# Altium PCB isa_svga.PcbDoc (part 1 of 2)
Units mm, origin at the board's own origin, x right, y up, seen from the top; angles counter-clockwise.
Board outline 104.14 x 87.63 mm, 2 copper layers (Front, Back); 62 components, 153 nets, 436 pads, 95 vias.
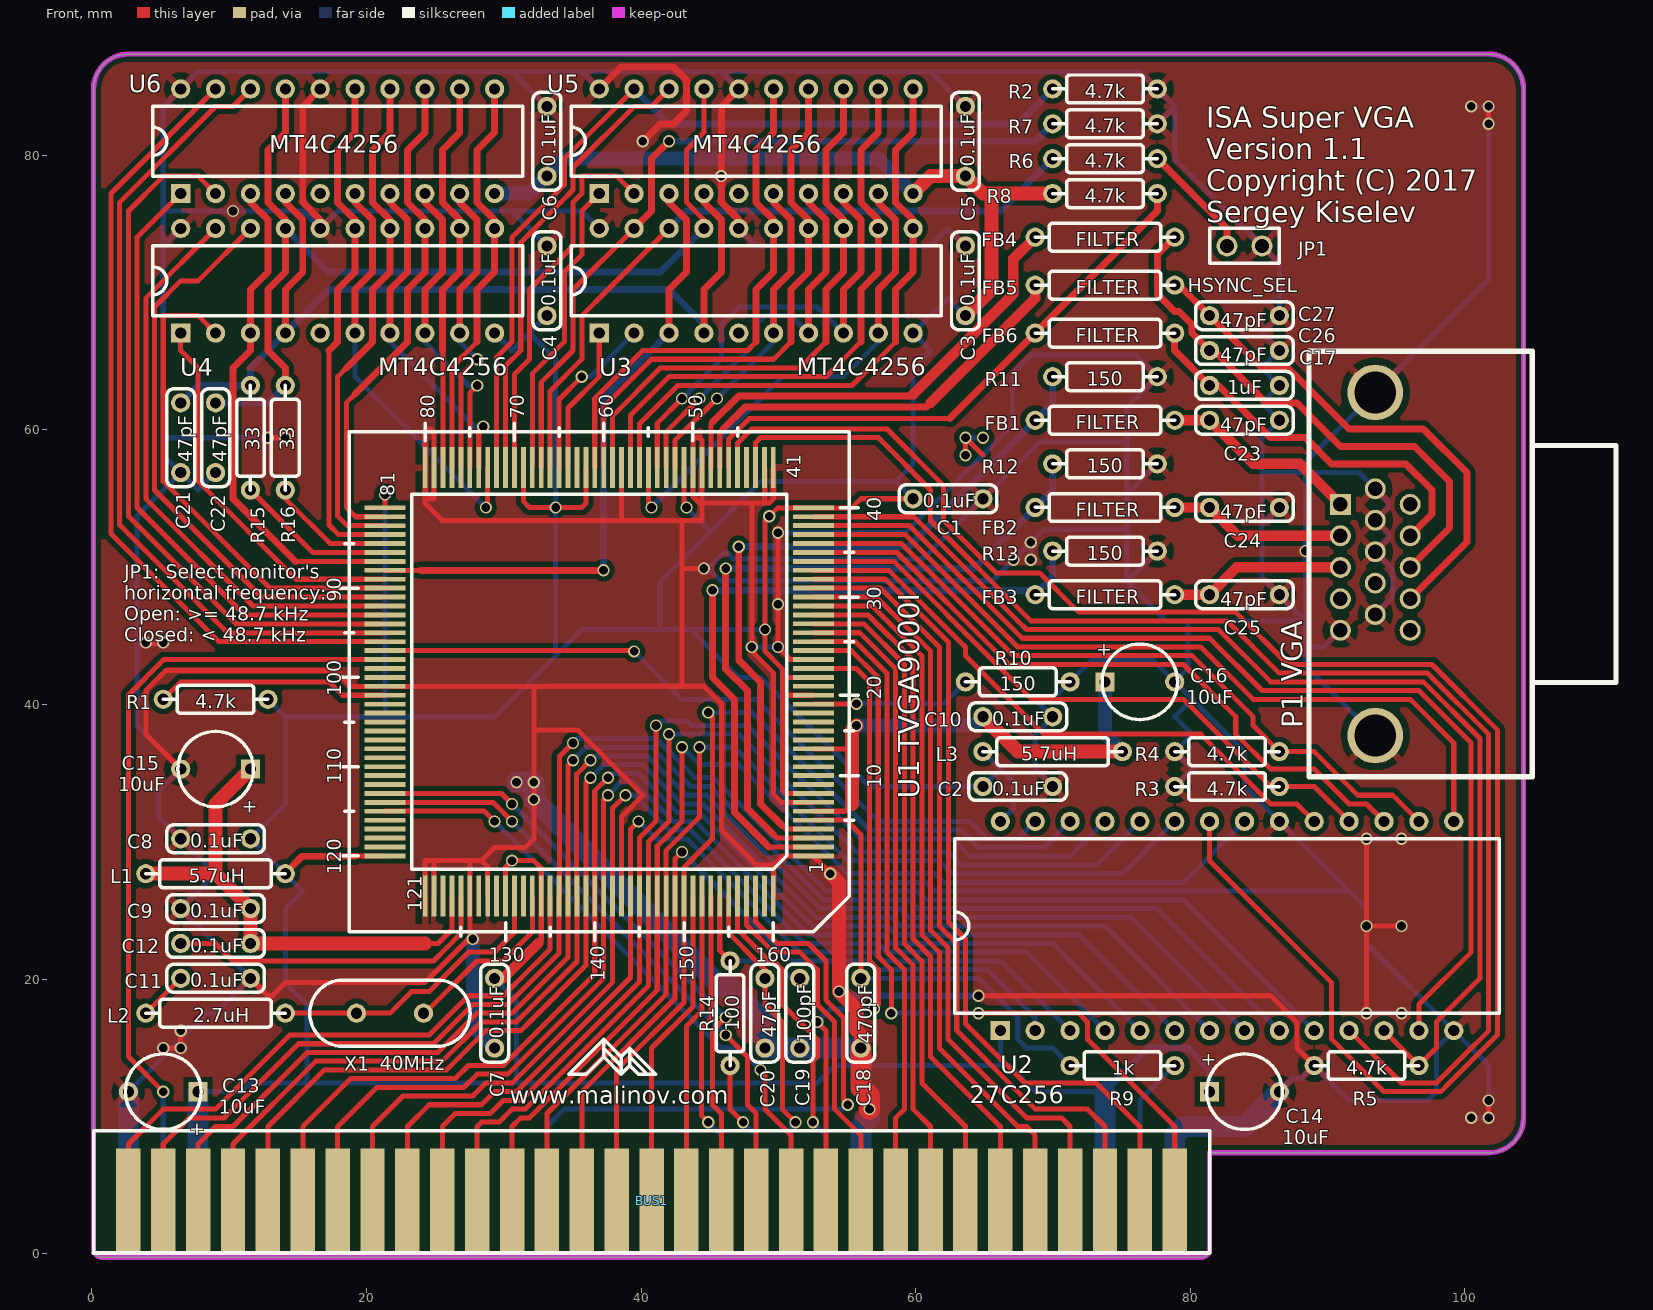
[diagram p0: Front view]
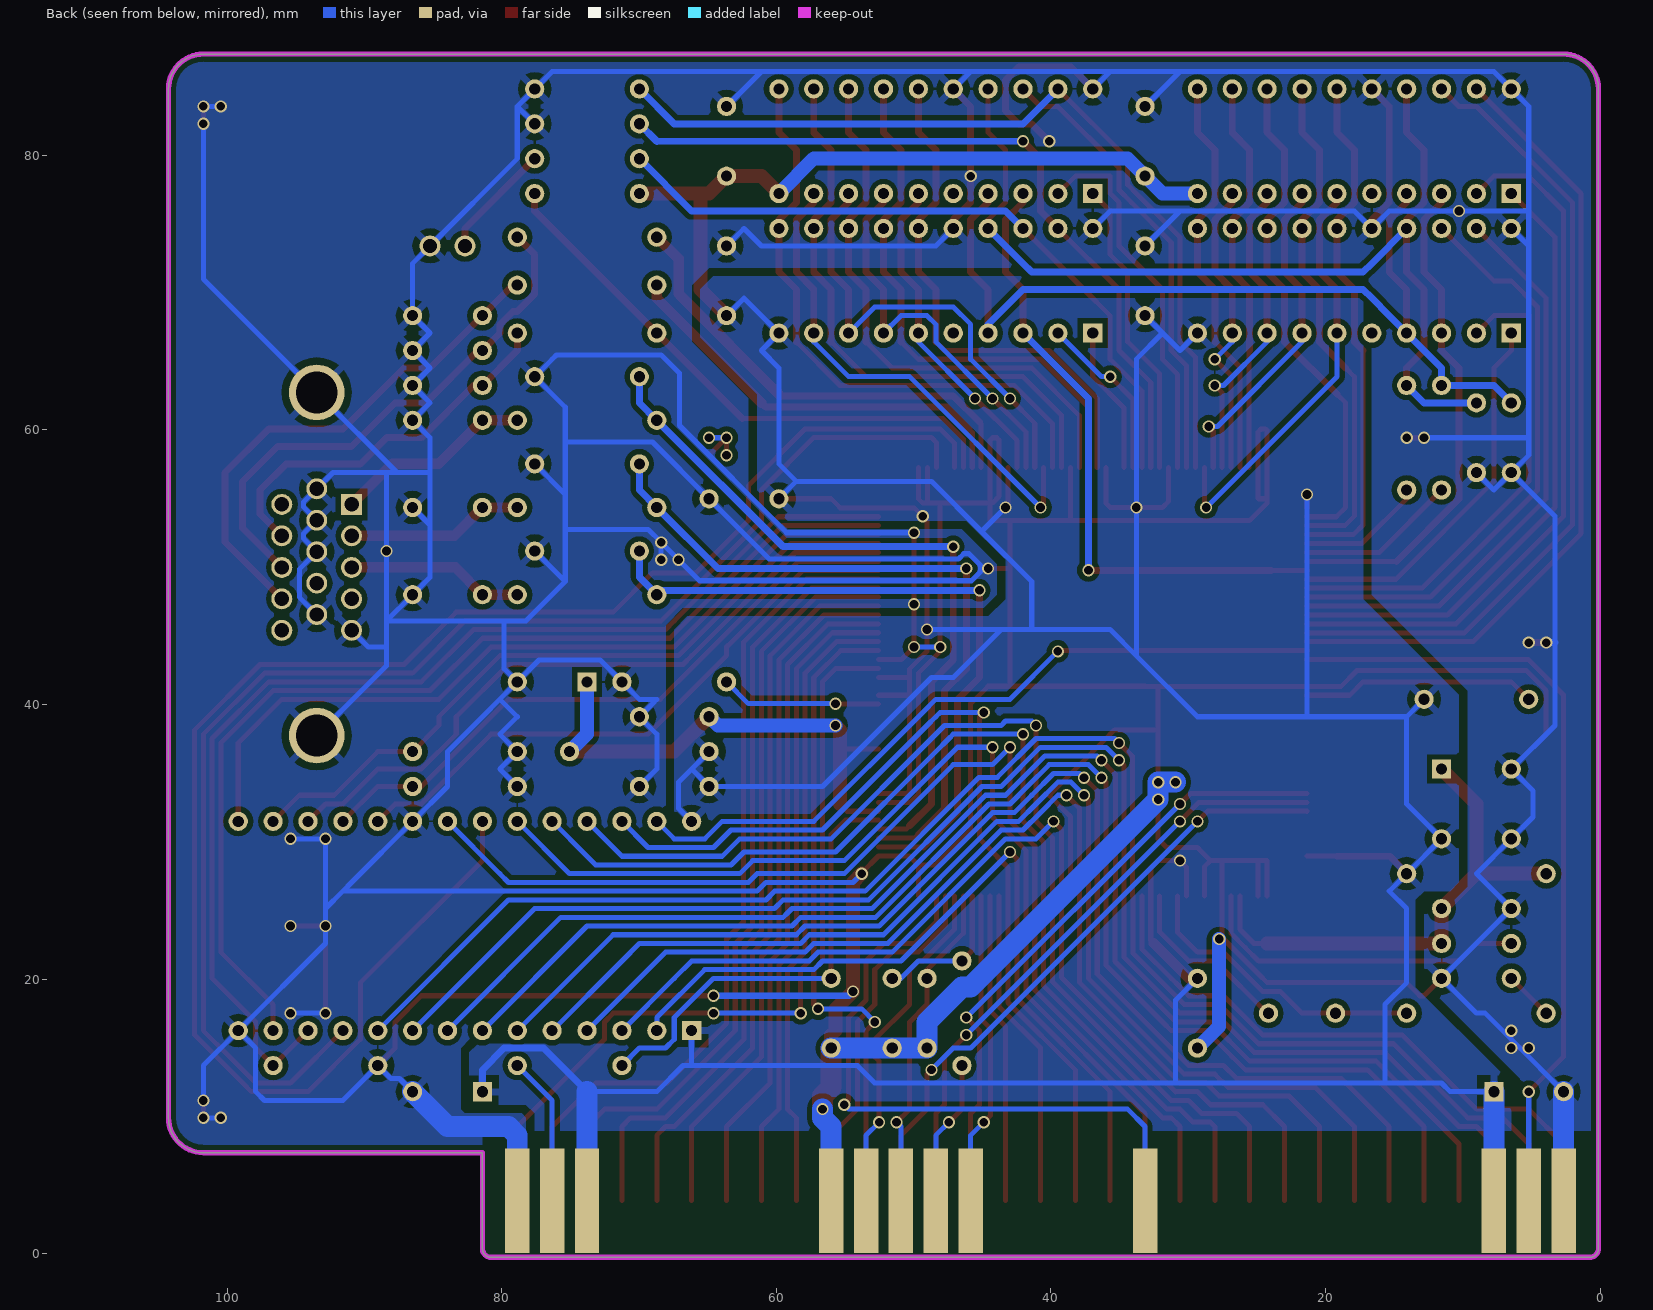
[diagram p1: Back view, seen from below]

## Layer stack, top to bottom
F.Mask: solder mask 0.0102, Solder Resist, Dk 3.5
Front: signal copper 0.0356
Dielectric 1: dielectric 0.32, FR-4, Dk 4.8
Back: signal copper 0.0356
B.Mask: solder mask 0.0102, Solder Resist, Dk 3.5

## Board outline
0.127,0.381 0.127,84.836 cw(c2.667,84.836) 101.727,87.376 cw(c101.727,84.836) 104.267,84.836 104.267,9.906 cw(c101.727,9.906) 101.727,7.366 81.407,7.366 81.407,0.381 cw(c80.772,0.381) 80.772,-0.254 0.762,-0.254 cw(c0.762,0.381) 0.127,0.381

## Design rules (kind name [scope] priority, off if disabled: settings)
Clearance "Clearence 0.37846_Polygon" [InNamedPolygon('Front-GND') OR InNamedPolygon('Back-VCC') OR InNamedPolygon('Back-GND')] p1: gap=0.378 ignorepadtopadclearanceinfootprint=FALSE
Clearance "Clearence 0.254_NetClass" [InNetClass('Default') OR InNetClass('Power')] p2: gap=0.254 ignorepadtopadclearanceinfootprint=FALSE
HoleSize "Hole Size (Default)" [All] p1: absolutevalues=TRUE maxlimit=10 minlimit=0.508 maxpercent=80.000 minpercent=20.000
MinimumSolderMaskSliver [All] p1: minsoldermaskwidth=0
PolygonConnect Polygon_Back-GND_ConnectDirect [IsNamedPolygon('Back-GND') vs IsVia] p1: connectstyle=Direct reliefconductorwidth=0.254 reliefentries=4 polygonreliefangle="90 Angle" airgapwidth=0.254
PolygonConnect Polygon_Back-GND_ConnectRelief45 [IsNamedPolygon('Back-GND') vs (IsThruPin or IsSMTPin) and (PadShape_AllLayers = 'Round')] p2: connectstyle=Relief reliefconductorwidth=0.508 reliefentries=4 polygonreliefangle="45 Angle" airgapwidth=0.508
PolygonConnect Polygon_Back-GND_ConnectRelief90 [IsNamedPolygon('Back-GND') vs (IsThruPin or IsSMTPin) and (PadShape_AllLayers <> 'Round')] p3: connectstyle=Relief reliefconductorwidth=0.508 reliefentries=4 polygonreliefangle="90 Angle" airgapwidth=0.508
PolygonConnect Polygon_Back-VCC_ConnectDirect [IsNamedPolygon('Back-VCC') vs IsVia] p4: connectstyle=Direct reliefconductorwidth=0.254 reliefentries=4 polygonreliefangle="90 Angle" airgapwidth=0.254
PolygonConnect Polygon_Back-VCC_ConnectRelief45 [IsNamedPolygon('Back-VCC') vs (IsThruPin or IsSMTPin) and (PadShape_AllLayers = 'Round')] p5: connectstyle=Relief reliefconductorwidth=0.508 reliefentries=4 polygonreliefangle="45 Angle" airgapwidth=0.508
PolygonConnect Polygon_Back-VCC_ConnectRelief90 [IsNamedPolygon('Back-VCC') vs (IsThruPin or IsSMTPin) and (PadShape_AllLayers <> 'Round')] p6: connectstyle=Relief reliefconductorwidth=0.508 reliefentries=4 polygonreliefangle="90 Angle" airgapwidth=0.508
PolygonConnect Polygon_Front-GND_ConnectDirect [IsNamedPolygon('Front-GND') vs IsVia] p7: connectstyle=Direct reliefconductorwidth=0.254 reliefentries=4 polygonreliefangle="90 Angle" airgapwidth=0.254
PolygonConnect Polygon_Front-GND_ConnectRelief45 [IsNamedPolygon('Front-GND') vs (IsThruPin or IsSMTPin) and (PadShape_AllLayers = 'Round')] p8: connectstyle=Relief reliefconductorwidth=0.508 reliefentries=4 polygonreliefangle="45 Angle" airgapwidth=0.508
PolygonConnect Polygon_Front-GND_ConnectRelief90 [IsNamedPolygon('Front-GND') vs (IsThruPin or IsSMTPin) and (PadShape_AllLayers <> 'Round')] p9: connectstyle=Relief reliefconductorwidth=0.508 reliefentries=4 polygonreliefangle="90 Angle" airgapwidth=0.508
RoutingVias [All] p1: holewidth=0.711 width=1.27 viastyle="Through Hole" minholewidth=0.711 minwidth=1.27 maxholewidth=0.711 maxwidth=1.27
SilkToSilkClearance [All] p1: silktosilkclearance=0
SilkToSolderMaskClearance [IsPad] p1: minsilkscreentomaskgap=0 clearancetoexposedcopper=TRUE
SolderMaskExpansion [All] p1: expansion=0.102 istentingtop=FALSE
Width [All] p1: maxlimit=10 minlimit=0.203 preferedwidth=0.368 minimp=50.000000 maximp=50.000000 favimp=50.000000
26 further rules are at their usual default settings.

## Classes and differential pairs
net class Default: A0 A1 A2 A3 A4 A5 A6 A7 A8 A9 A10 A11 A12 A13 A14 A15 A16 A17 A18 A19 AEN AVDD1 AVDD2 B BLUE C\A\S\ D0 D1 D2 D3 D4 D5 D6 D7 G GND GREEN HSYNC I\O\R\ I\O\W\ IOCHRDY M\E\M\R\ M\E\M\W\ MAA0 MAA1 MAA2 MAA3 MAA4 MAA5 MAA6 MAA7 MAA8 MAB0 MAB1 MAB2 MAB3 MAB4 MAB5 MAB6 MAB7 MAB8 MD0 MD1 MD2 MD3 MD4 MD5 MD6 MD7 MD16 MD17 MD18 MD19 MD20 MD21 MD22 MD23 MONITOR N\M\I\ Net-(C11-Pad1) Net-(C12-Pad2) Net-(C17-Pad1) Net-(C18-Pad1) Net-(C19-Pad1) Net-(C26-Pad1) Net-(C27-Pad1) Net-(JP1-Pad1) Net-(L2-Pad2) Net-(P1-Pad4) Net-(P1-Pad9) Net-(P1-Pad11) Net-(P1-Pad15) Net-(R1-Pad1) Net-(R10-Pad1) Net-(R15-Pad1) Net-(R16-Pad1) Net-(U1-Pad9) Net-(U1-Pad10) Net-(U1-Pad11) Net-(U1-Pad12) Net-(U1-Pad14) Net-(U1-Pad15) Net-(U1-Pad16) Net-(U1-Pad17) Net-(U1-Pad20) Net-(U1-Pad44) Net-(U1-Pad63) Net-(U1-Pad99) Net-(U1-Pad100) Net-(U1-Pad103) Net-(U1-Pad104) Net-(U1-Pad105) Net-(U1-Pad106) Net-(U1-Pad107) Net-(U1-Pad108) Net-(U1-Pad109) Net-(U1-Pad110) Net-(U1-Pad111) Net-(U1-Pad112) Net-(U1-Pad116) Net-(U1-Pad117) Net-(U1-Pad118) Net-(U1-Pad119) Net-(U1-Pad123) Net-(U1-Pad127) Net-(U1-Pad129) Net-(U1-Pad132) Net-(U1-Pad133) Net-(U1-Pad159) Net-(U3-Pad5) Net-(U4-Pad5) Net-(U5-Pad5) Net-(U6-Pad5) OSC R R\A\S\ R\E\F\R\E\S\H\ R\O\M\C\S\ RED RESET RMD0 RMD1 RMD2 RMD3 RMD4 RMD5 RMD6 RMD7 ROMA0 VCC VSYNC W\E\0\ W\E\2\

## Components (designator, comment, footprint, x,y, rotation, side; value= is the part's Value field where it differs from the comment)
BUS1 "BUSPC_DEV" Conn_Bus_ISA8 40.767,3.873 r0 top
C1 "0.1uF" Cap_Cer_504 62.357,54.991 r0 top
C2 "0.1uF" Cap_Cer_504 67.437,34.036 r0 top
C3 "0.1uF" Cap_Cer_504 63.627,70.866 r90 top
C4 "0.1uF" Cap_Cer_504 33.147,70.866 r90 top
C5 "0.1uF" Cap_Cer_504 63.627,81.026 r90 top
C6 "0.1uF" Cap_Cer_504 33.147,81.026 r90 top
C7 "0.1uF" Cap_Cer_504 29.337,17.526 r270 top
C8 "0.1uF" Cap_Cer_504 9.017,30.226 r180 top
C9 "0.1uF" Cap_Cer_504 9.017,25.146 r180 top
C10 "0.1uF" Cap_Cer_504 67.437,39.116 r0 top
C11 "0.1uF" Cap_Cer_504 9.017,20.066 r0 top
C12 "0.1uF" Cap_Cer_504 9.017,22.606 r180 top
C13 "10uF" Cap_Tant_504 5.207,11.811 r180 top
C14 "10uF" Cap_Tant_504 83.947,11.811 r0 top
C15 "10uF" Cap_Tant_504 9.017,35.306 r180 top
C16 "10uF" Cap_Tant_504 76.327,41.656 r0 top
C17 "1uF" Cap_Cer_504 83.947,63.246 r0 top
C18 "470pF" Cap_Cer_504 56.007,17.526 r270 top
C19 "100pF" Cap_Cer_504 51.562,17.526 r270 top
C20 "47pF" Cap_Cer_504 49.022,17.526 r270 top
C21 "47pF" Cap_Cer_504 6.477,59.436 r270 top
C22 "47pF" Cap_Cer_504 9.017,59.436 r270 top
C23 "47pF" Cap_Cer_504 83.947,60.706 r0 top
C24 "47pF" Cap_Cer_504 83.947,54.356 r0 top
C25 "47pF" Cap_Cer_504 83.947,48.006 r0 top
C26 "47pF" Cap_Cer_504 83.947,65.786 r0 top
C27 "47pF" Cap_Cer_504 83.947,68.326 r0 top
FB1 "FILTER" Res_1016 73.787,60.706 r0 top
FB2 "FILTER" Res_1016 73.787,54.356 r0 top
FB3 "FILTER" Res_1016 73.787,48.006 r0 top
FB4 "FILTER" Res_1016 73.787,74.041 r180 top
FB5 "FILTER" Res_1016 73.787,70.549 r180 top
FB6 "FILTER" Res_1016 73.787,67.056 r180 top
JP1 "HSYNC_SEL" Conn_Pin_Header_2x1_Nokey 83.947,73.406 r0 top
L1 "5.7uH" Res_1016 9.017,27.686 r180 top
L2 "2.7uH" Res_1016 9.017,17.526 r0 top
L3 "5.7uH" Res_1016 69.977,36.576 r0 top
P1 "VGA" Conn_Dsub_DE15F 93.472,50.241 r270 top
R1 "4.7k" Res_762 9.017,40.386 r0 top
R2 "4.7k" Res_762 73.787,84.836 r0 top
R3 "4.7k" Res_762 82.677,34.036 r180 top
R4 "4.7k" Res_762 82.677,36.576 r180 top
R5 "4.7k" Res_762 92.837,13.716 r180 top
R6 "4.7k" Res_762 73.787,79.756 r0 top
R7 "4.7k" Res_762 73.787,82.296 r0 top
R8 "4.7k" Res_762 73.787,77.216 r180 top
R9 "1k" Res_762 75.057,13.716 r180 top
R10 "150" Res_762 67.437,41.656 r0 top
R11 "150" Res_762 73.787,63.881 r0 top
R12 "150" Res_762 73.787,57.531 r0 top
R13 "150" Res_762 73.787,51.181 r0 top
R14 "100" Res_762 46.482,17.526 r90 top
R15 "33" Res_762 11.557,59.436 r90 top
R16 "33" Res_762 14.097,59.436 r90 top
U1 "TVGA9000I" PQFP-160 36.957,41.656 r90 top
U2 "27C256" DIP28_600 82.677,23.876 r0 top
U3 "MT4C4256" DIP20_300 48.387,70.866 r0 top
U4 "MT4C4256" DIP20_300 17.907,70.866 r0 top
U5 "MT4C4256" DIP20_300 48.387,81.026 r0 top
U6 "MT4C4256" DIP20_300 17.907,81.026 r0 top
X1 "40MHz" Crystal_HC-49U_Vert 21.717,17.526 r180 top

## Footprints (in the part's own frame and the unit in brackets; to place one, negate y for a bottom-side part, rotate by r counter-clockwise, add the part's x,y. Pads: shape width x height; smd on the part's side, far side on the other; paste and mask are expansions set on the pad)
Cap_Cer_504 [mil]
  round 55 hole 32 paste-55 mask+10: 1(-100,0) 2(100,0)
  silkscreen extent -140,-40 140,40
Cap_Tant_504 [mil]
  rect 55x55 hole 32 paste-55 mask+10: 1(-100,0)
  round 55 hole 32 paste-55 mask+10: 2(100,0)
  silkscreen extent -108,-108 108,108
Conn_Bus_ISA8 [mil]
  rect 70x300 smd far side paste-300 mask+10: 1(1500,0) 2(1400,0) 3(1300,0) 10(600,0) 11(500,0) 12(400,0) 13(300,0) 14(200,0) 19(-300,0) 29(-1300,0) 30(-1400,0) 31(-1500,0)
  rect 70x300 smd paste-300 mask+10: 32(1500,0) 33(1400,0) 34(1300,0) 35(1200,0) 36(1100,0) 37(1000,0) 38(900,0) 39(800,0) 40(700,0) 41(600,0) 42(500,0) 43(400,0) 44(300,0) 45(200,0) 46(100,0) 47(0,0) 48(-100,0) 49(-200,0) 50(-300,0) 51(-400,0) 52(-500,0) 53(-600,0) 54(-700,0) 55(-800,0) 56(-900,0) 57(-1000,0) 58(-1100,0) 59(-1200,0) 60(-1300,0) 61(-1400,0) 62(-1500,0)
  silkscreen extent -1600,-150 1600,200
Conn_Dsub_DE15F [mil]
  rect 60x60 hole 41 paste-60 mask+10: 1(-170.9,-100)
  round 60 hole 41 paste-60 mask+10: 2(-80.7,-100) 3(9.8,-100) 4(100,-100) 5(190.2,-100) 6(-215.6,0) 7(-125.4,0) 8(-35.2,0) 9(54.9,0) 10(145.1,0) 11(-170.9,100) 12(-80.7,100) 13(9.8,100) 14(100,100) 15(190.2,100)
  round 159.4 hole 120.1 paste-159.4 mask+10: Un1(491.9,0) Un2(-491.9,0)
  silkscreen extent -610,-190 610,690
Conn_Pin_Header_2x1_Nokey [mil]
  rrect100% 60x60 hole 40 paste-60 mask+10: 1(-50,0)
  round 60 hole 40 paste-60 mask+10: 2(50,0)
  silkscreen extent -100,-50 100,50
Crystal_HC-49U_Vert [mil]
  round 55 hole 32 paste-55 mask+10: 1(-96.1,0) 2(96.1,0)
  silkscreen extent -230,-95 230,95
DIP20_300 [mil]
  rect 55x55 hole 32 paste-55 mask+10: 1(-450,-150)
  round 55 hole 32 paste-55 mask+10: 2(-350,-150) 3(-250,-150) 4(-150,-150) 5(-50,-150) 6(50,-150) 7(150,-150) 8(250,-150) 9(350,-150) 10(450,-150) 11(450,150) 12(350,150) 13(250,150) 14(150,150) 15(50,150) 16(-50,150) 17(-150,150) 18(-250,150) 19(-350,150) 20(-450,150)
  silkscreen extent -530,-100 530,100
DIP28_600 [mil]
  rect 55x55 hole 32 paste-55 mask+10: 1(-650,-300)
  round 55 hole 32 paste-55 mask+10: 2(-550,-300) 3(-450,-300) 4(-350,-300) 5(-250,-300) 6(-150,-300) 7(-50,-300) 8(50,-300) 9(150,-300) 10(250,-300) 11(350,-300) 12(450,-300) 13(550,-300) 14(650,-300) 15(650,300) 16(550,300) 17(450,300) 18(350,300) 19(250,300) 20(150,300) 21(50,300) 22(-50,300) 23(-150,300) 24(-250,300) 25(-350,300) 26(-450,300) 27(-550,300) 28(-650,300)
  silkscreen extent -780,-250 780,250
PQFP-160 [mil]
  rect 13.8x118.1 smd mask+10: 1(-499,-614.2) 2(-473.4,-614.2) 3(-447.8,-614.2) 4(-422.2,-614.2) 5(-396.6,-614.2) 6(-371,-614.2) 7(-345.4,-614.2) 8(-319.9,-614.2) 9(-294.3,-614.2) 10(-268.7,-614.2) 11(-243.1,-614.2) 12(-217.5,-614.2) 13(-191.9,-614.2) 14(-166.3,-614.2) 15(-140.7,-614.2) 16(-115.1,-614.2) 17(-89.5,-614.2) 18(-63.9,-614.2) 19(-38.4,-614.2) 20(-12.8,-614.2) 21(12.8,-614.2) 22(38.4,-614.2) 23(64,-614.2) 24(89.6,-614.2) 25(115.2,-614.2) 26(140.8,-614.2) 27(166.4,-614.2) 28(192,-614.2) 29(217.5,-614.2) 30(243.1,-614.2) 31(268.7,-614.2) 32(294.3,-614.2) 33(319.9,-614.2) 34(345.5,-614.2) 35(371.1,-614.2) 36(396.7,-614.2) 37(422.3,-614.2) 38(447.9,-614.2) 39(473.5,-614.2) 40(499,-614.2) 81(499,614.2) 82(473.4,614.2) 83(447.8,614.2) 84(422.2,614.2) 85(396.6,614.2) 86(371.1,614.2) 87(345.5,614.2) 88(319.9,614.2) 89(294.3,614.2) 90(268.7,614.2) 91(243.1,614.2) 92(217.5,614.2) 93(191.9,614.2) 94(166.3,614.2) 95(140.7,614.2) 96(115.2,614.2) 97(89.6,614.2) 98(64,614.2) 99(38.4,614.2) 100(12.8,614.2) 101(-12.8,614.2) 102(-38.4,614.2) 103(-64,614.2) 104(-89.6,614.2) 105(-115.2,614.2) 106(-140.8,614.2) 107(-166.3,614.2) 108(-191.9,614.2) 109(-217.5,614.2) 110(-243.1,614.2) 111(-268.7,614.2) 112(-294.3,614.2) 113(-319.9,614.2) 114(-345.5,614.2) 115(-371.1,614.2) 116(-396.7,614.2) 117(-422.2,614.2) 118(-447.8,614.2) 119(-473.4,614.2) 120(-499,614.2)
  rect 118.1x13.8 smd mask+10: 41(614.2,-499) 42(614.2,-473.4) 43(614.2,-447.8) 44(614.2,-422.2) 45(614.2,-396.7) 46(614.2,-371.1) 47(614.2,-345.5) 48(614.2,-319.9) 49(614.2,-294.3) 50(614.2,-268.7) 51(614.2,-243.1) 52(614.2,-217.5) 53(614.2,-191.9) 54(614.2,-166.3) 55(614.2,-140.8) 56(614.2,-115.2) 57(614.2,-89.6) 58(614.2,-64) 59(614.2,-38.4) 60(614.2,-12.8) 61(614.2,12.8) 62(614.2,38.4) 63(614.2,64) 64(614.2,89.6) 65(614.2,115.2) 66(614.2,140.8) 67(614.2,166.3) 68(614.2,191.9) 69(614.2,217.5) 70(614.2,243.1) 71(614.2,268.7) 72(614.2,294.3) 73(614.2,319.9) 74(614.2,345.5) 75(614.2,371.1) 76(614.2,396.7) 77(614.2,422.2) 78(614.2,447.8) 79(614.2,473.4) 80(614.2,499) 121(-614.2,499) 122(-614.2,473.4) 123(-614.2,447.8) 124(-614.2,422.2) 125(-614.2,396.7) 126(-614.2,371.1) 127(-614.2,345.5) 128(-614.2,319.9) 129(-614.2,294.3) 130(-614.2,268.7) 131(-614.2,243.1) 132(-614.2,217.5) 133(-614.2,191.9) 134(-614.2,166.3) 135(-614.2,140.8) 136(-614.2,115.2) 137(-614.2,89.6) 138(-614.2,64) 139(-614.2,38.4) 140(-614.2,12.8) 141(-614.2,-12.8) 142(-614.2,-38.4) 143(-614.2,-64) 144(-614.2,-89.6) 145(-614.2,-115.2) 146(-614.2,-140.7) 147(-614.2,-166.3) 148(-614.2,-191.9) 149(-614.2,-217.5) 150(-614.2,-243.1) 151(-614.2,-268.7) 152(-614.2,-294.3) 153(-614.2,-319.9) 154(-614.2,-345.5) 155(-614.2,-371.1) 156(-614.2,-396.6) 157(-614.2,-422.2) 158(-614.2,-447.8) 159(-614.2,-473.4) 160(-614.2,-499)
  silkscreen extent -742,-742 742,742
Res_762 [mil]
  round 55 hole 32 paste-55 mask+10: 1(-150,0) 2(150,0)
  silkscreen extent -150,-40 150,40
Res_1016 [mil]
  round 55 hole 32 paste-55 mask+10: 1(-200,0) 2(200,0)
  silkscreen extent -200,-40 200,40

## Part data
BUS1: library part Conn_Bus_ISA8, "ISA8 PCB edge connector"
C1 C2 C3 C4 C5 C6 C7 C8 C9 C10 C11 C12 C17 C18 C19 C20 C21 C22 C23 C24 C25 C26 C27: library part Cap_Cer_504, "Ceramic Capacitor 5.04mm"
C13 C14 C15 C16: library part Cap_Tant_504, "Tantalum Capacitor - 5.04mm"
FB1 FB2 FB3 FB4 FB5 FB6 L1 L2 L3: library part Res_1016, "Resistor 10.16mm between leads"
JP1: library part Conn_Pin_Header_2x1_Nokey, "Connector Pin Header 2x1 No Key"
P1: library part Conn_Dsub_DE15F, "Connector DE15 Female Right Angle Through Hole"
R1 R2 R3 R4 R5 R6 R7 R8 R9 R10 R11 R12 R13 R14 R15 R16: library part Res_762, "Resitance 3 pas"
U1: library part PQFP-160
U2: library part DIP28_600, "Module Dil 28 pins, pads ronds, e=600 mils"
U3 U4 U5 U6: library part DIP20_300, "20 pins DIL package, round pads"
X1: library part Crystal_HC-49U_Vert, "Quartz Crystal HC-49U Vertical"

## Via types
v1: diameter 0.889, hole 0.635, Front to Back, tented both sides, 95 vias

## Nets (pads, with @x,y where several pads share a name; then routed paths per layer and width w, separated by ;. In a path a pad name is that pad's centre, name@x,y a point inside that pad or via, vN(x,y) a via of type N, cw(c..) or ccw(c..) an arc to the next point about the centre after c; other vN are vias at no path point)
A0: BUS1.62 U1.135 | length 44.6
  Front w0.368: BUS1.62@2.667,3.873 2.667,8.001 5.207,10.541 9.017,10.541 14.414,15.938 23.939,15.938 24.575,15.938 27.432,18.796 29.972,18.796 30.607,19.431 31.242,20.066 33.381,22.205 33.381,24.194 U1.135@33.381,26.055
A1: BUS1.61 U1.136 U2.10 | length 120.2
  Front w0.368: BUS1.61@5.207,3.873 5.207,8.001 7.112,9.906 9.652,9.906 15.05,15.303 24.257,15.303 24.892,15.303 27.749,18.161 29.972,18.161 29.972,18.166 30.295,18.166 31.242,19.113 31.877,19.748 34.031,21.902 U1.136@34.031,26.055 ; 34.031,23.236 34.031,23.241 U1.136@34.031,26.055 ; v1(35.052,37.211) 34.099,36.258 34.051,36.258 34.051,33.988 34.051,26.055 U1.136@34.031,26.055
  Back w0.368: v1(35.052,37.211) 35.369,37.529 41.084,37.529 43.912,34.701 45.245,34.701 53.53,26.416 53.721,26.416 59.187,26.416 ; U2.10@89.027,16.256 79.502,25.781 60.759,25.781 60.759,25.776 60.134,26.401 60.134,26.411 60.134,26.416 59.187,26.416 ; 59.187,26.416 59.187,26.421 59.187,26.416
A2: BUS1.60 U1.137 U2.9 | length 111.9
  Front w0.368: BUS1.60@7.747,3.873 7.747,8.001 9.017,9.271 10.287,9.271 15.684,14.668 23.939,14.668 25.204,14.668 28.062,17.526 ; v1(35.052,35.941) 34.681,35.57 34.681,34.989 34.681,33.665 U1.137@34.681,26.055 34.681,24.194 34.681,21.6 30.607,17.526 28.062,17.526 ; 28.062,17.526 28.062,17.531 28.062,17.526
  Back w0.368: v1(35.052,35.941) 35.999,36.888 40.767,36.888 40.772,36.888 43.624,34.036 45.021,34.036 53.276,25.781 58.547,25.781 ; 77.607,25.141 77.602,25.146 77.597,25.146 ; U2.9@86.487,16.256 86.487,16.261 77.597,25.151 77.597,25.146 ; 58.547,25.781 58.864,25.781 ; 58.547,25.781 59.499,25.781 60.134,25.146 77.597,25.146 ; 58.864,25.781 58.864,25.776 58.864,25.781
A3: BUS1.59 U1.138 U2.8 | length 105.8
  Front w0.368: BUS1.59@10.287,3.873 10.287,8.001 10.287,8.006 16.317,14.036 25.53,14.036 28.384,16.891 29.019,16.891 29.019,16.896 30.93,16.896 35.331,21.298 35.331,21.653 35.331,22.606 U1.138@35.331,26.055 35.311,26.055 35.311,33.343 35.311,34.353 35.311,34.93 v1(36.322,35.941)
  Back w0.368: v1(36.322,35.941) 36.639,36.258 40.45,36.258 43.307,33.401 44.767,33.401 44.831,33.337 53.023,25.146 58.547,25.146 58.864,25.146 59.182,24.828 59.499,24.511 75.692,24.511 U2.8@83.947,16.256
A4: BUS1.58 U1.139 U2.7 | length 100.7
  Front w0.368: BUS1.58@12.827,3.873 12.827,9.271 16.954,13.399 25.845,13.399 26.797,14.351 28.702,16.256 31.242,16.256 31.877,16.891 35.982,20.996 35.982,21.653 U1.139@35.982,26.055 36.002,26.055 36.002,32.766 36.002,33.718 36.002,34.351 v1(36.322,34.671)
  Back w0.368: v1(36.322,34.671) 37.274,35.623 40.132,35.623 41.719,34.036 42.989,32.766 44.514,32.766 52.768,24.511 58.229,24.511 58.229,24.506 58.859,23.876 73.787,23.876 U2.7@81.407,16.256
A5: BUS1.57 U1.140 U2.6 | length 95.1
  Front w0.368: BUS1.57@15.367,3.873 15.367,9.271 18.86,12.763 26.479,12.763 27.432,13.716 29.972,13.716 36.632,20.376 36.632,21.971 U1.140@36.632,26.055 36.632,32.131 36.632,33.718 36.639,33.718 v1(37.592,34.671)
  Back w0.368: v1(37.592,34.671) 37.91,34.989 39.814,34.989 41.402,33.401 42.672,32.131 44.259,32.131 52.514,23.876 53.149,23.876 57.912,23.876 58.547,23.241 71.882,23.241 U2.6@78.867,16.256
A6: BUS1.56 U1.141 U2.5 | length 90
  Front w0.368: BUS1.56@17.907,3.873 17.907,9.271 20.764,12.128 27.114,12.128 28.067,13.081 28.067,13.086 30.295,13.086 37.282,20.074 U1.141@37.282,26.055 37.282,31.496 ; 37.282,32.139 37.282,32.131 37.282,31.496 ; v1(37.592,33.401) 37.282,33.091 37.282,33.084 37.282,31.496
  Back w0.368: v1(37.592,33.401) 38.544,34.353 39.497,34.353 41.084,32.766 42.355,31.496 43.942,31.496 52.197,23.241 52.832,23.241 53.467,23.241 57.594,23.241 58.229,22.606 69.977,22.606 71.247,21.336 U2.5@76.327,16.256
A7: BUS1.55 U1.142 U2.4 | length 83.3
  Front w0.368: BUS1.55@20.447,3.873 20.447,9.271 22.669,11.493 27.749,11.493 28.702,12.446 28.702,12.456 30.617,12.456 37.932,19.771 37.932,20.383 37.932,21.018 U1.142@37.932,26.055 37.932,31.496 37.932,31.813 ; 37.932,31.836 37.932,31.813 ; 37.932,32.154 37.932,32.131 ; v1(38.862,33.401) 37.932,32.471 37.932,32.131 ; 37.932,31.813 37.932,32.131
  Back w0.368: v1(38.862,33.401) 39.497,33.401 40.767,32.131 42.037,30.861 43.624,30.861 51.88,22.606 52.514,22.606 52.832,22.606 57.277,22.606 57.277,22.601 57.907,21.971 68.072,21.971 69.342,20.701 U2.4@73.787,16.256
A8: BUS1.54 U1.144 U2.3 | length 75.5
  Front w0.368: BUS1.54@22.987,3.873 22.987,9.271 24.575,10.858 28.384,10.858 29.337,11.811 30.924,11.811 ; v1(39.814,31.496) 39.233,30.914 39.233,28.956 U1.144@39.233,26.055 39.233,20.701 39.233,20.119 30.924,11.811 ; 30.924,11.811 30.924,11.806 30.924,11.811
  Back w0.368: v1(39.814,31.496) 41.084,30.226 43.307,30.226 51.562,21.971 52.197,21.971 56.959,21.971 57.594,21.336 66.167,21.336 67.437,20.066 U2.3@71.247,16.256
A9: BUS1.53 U1.145 U2.25 | length 81.2
  Front w0.368: BUS1.53@25.527,3.873 25.527,9.271 26.479,10.223 29.019,10.223 29.972,11.176 31.242,11.176 39.814,19.748 39.883,19.817 U1.145@39.883,26.055 39.883,28.639 39.883,30.295 41.084,31.496 41.084,37.846 41.084,38.163 v1(41.084,38.481)
  Back w0.368: v1(41.084,38.481) 41.402,38.798 43.307,38.798 43.624,38.481 47.752,38.481 48.704,37.529 56.007,30.226 62.674,30.226 63.944,28.956 71.247,28.956 71.882,29.591 U2.25@73.787,31.496
A10: BUS1.52 U1.146 U2.24 | length 80.6
  Front w0.368: BUS1.52@28.067,3.873 28.067,9.271 28.384,9.588 29.654,9.588 30.612,10.546 31.565,10.546 40.531,19.512 40.531,19.748 U1.146@40.531,26.055 40.531,29.591 40.531,29.99 42.037,31.496 42.037,37.211 v1(42.037,37.846)
  Back w0.368: v1(42.037,37.846) 47.117,37.846 47.434,37.529 48.387,36.576 55.689,29.273 62.357,29.273 63.309,28.321 73.152,28.321 73.787,28.956 U2.24@76.327,31.496
A11: BUS1.51 U1.147 U2.21 | length 85.4
  Front w0.368: BUS1.51@30.607,3.873 30.607,9.271 31.242,9.906 31.877,9.906 41.181,19.21 41.181,20.066 41.181,20.383 U1.147@41.181,26.055 41.181,29.591 41.181,29.688 42.037,30.543 42.989,31.496 v1(42.989,36.893)
  Back w0.368: v1(42.989,36.893) 44.259,35.623 47.117,35.623 55.054,27.686 59.817,27.686 61.404,27.686 62.039,27.051 79.502,27.051 80.137,27.686 U2.21@83.947,31.496
A12: BUS1.50 U1.148 U2.23 | length 77.6
  Front w0.368: BUS1.50@33.147,3.873 33.147,8.636 33.147,10.223 41.831,18.908 41.831,21.018 U1.148@41.831,26.055 41.831,28.321 41.831,28.956 41.831,29.385 42.672,30.226 43.942,31.496 44.259,31.813 v1(44.259,36.893)
  Back w0.368: v1(44.259,36.893) 46.799,36.893 55.054,28.639 61.722,28.639 62.674,27.686 62.992,27.686 75.057,27.686 U2.23@78.867,31.496
A13: BUS1.49 U1.149 U2.2 | length 60.1
  Front w0.368: BUS1.49@35.687,3.873 35.687,9.271 35.687,11.811 42.481,18.605 42.481,20.066 U1.149@42.481,26.055 42.481,28.765 42.672,28.956 v1(42.989,29.273)
  Back w0.368: v1(42.989,29.273) 50.927,21.336 56.642,21.336 57.277,20.701 65.215,20.701 68.707,17.209 U2.2@68.707,16.256
A14: BUS1.48 U1.150 U2.26 | length 69.8
  Front w0.368: BUS1.48@38.227,3.873 38.227,9.271 38.227,10.541 38.227,13.399 43.132,18.303 43.132,19.113 U1.150@43.132,26.055 43.132,28.146 43.307,28.321 44.577,29.591 45.212,30.226 45.212,39.116 v1(44.895,39.433)
  Back w0.368: v1(44.895,39.433) 48.069,39.433 48.387,39.116 49.022,38.481 56.642,30.861 63.309,30.861 64.579,29.591 69.342,29.591 U2.26@71.247,31.496
A15: BUS1.47 U1.151 | length 23.4
  Front w0.368: BUS1.47@40.767,3.873 40.767,14.986 43.782,18.001 43.782,20.383 U1.151@43.782,26.055
A16: BUS1.46 U1.152 | length 22.6
  Front w0.368: BUS1.46@43.307,3.873 43.307,9.271 43.307,9.906 43.307,13.081 43.307,16.573 44.432,17.699 U1.152@44.432,26.055
A17: BUS1.45 U1.113 | length 45.6
  Front w0.368: U1.113@21.356,33.531 29.842,33.531 v1(30.607,32.766) ; BUS1.45@45.847,3.873 45.847,10.223 45.212,10.858 45.212,16.256 v1(46.164,17.209)
  Back w0.368: v1(30.607,32.766) v1(46.164,17.209)
A18: BUS1.44 U1.114 | length 44.8
  Front w0.368: U1.114@21.356,32.88 29.223,32.88 v1(30.607,31.496) ; v1(46.164,15.938) 47.752,14.351 47.752,10.858 48.387,10.223 BUS1.44@48.387,3.873
  Back w0.368: v1(30.607,31.496) v1(46.164,15.938)
A19: BUS1.43 U1.115 | length 47
  Front w0.368: v1(29.337,31.496) 28.583,32.25 U1.115@21.356,32.25 ; v1(48.704,13.399) 49.022,13.081 49.022,10.541 50.927,8.636 BUS1.43@50.927,3.873 ; U1.115@21.356,32.25 U1.115@21.356,32.23 U1.115@21.356,32.25
  Back w0.368: v1(29.337,31.496) 45.847,14.986 47.117,14.986 ; 48.069,14.034 47.117,14.986 ; v1(48.704,13.399) 47.117,14.986
AEN: BUS1.42 U1.22 | length 46.8
  Front w0.368: U1.22@52.558,42.631 54.419,42.631 ; v1(52.832,16.891) 53.467,16.256 53.467,15.938 BUS1.42@53.467,3.873 ; 54.714,42.631 54.419,42.631 ; v1(56.959,17.843) 57.277,18.161 57.277,20.701 56.642,21.336 56.642,41.656 55.667,42.631 54.737,42.631 54.419,42.631
  Back w0.368: v1(52.832,16.891) 53.785,17.843 v1(56.959,17.843)
AVDD1: C9.1 C12.1 C15.1 L1.2 U1.124 | length 48.6
  Front w0.368: L1.2@3.937,27.686 9.017,27.686 ; 9.017,32.766 C15.1@11.557,35.306 ; C12.1@11.557,22.606 C9.1@11.557,25.146 ; 24.257,22.606 25.209,22.606 26.233,23.63 U1.124@26.233,26.055
  Front w1.016: L1.2@3.937,27.686 9.017,27.686 ; C15.1@11.557,35.306 9.017,32.766 9.017,27.686 ; 24.257,22.606 C12.1@11.557,22.606 C9.1@11.557,25.146 9.017,27.686
AVDD2: C10.1 C16.1 L3.2 U1.6 U1.13 | length 45.5
  Front w0.368: U1.6@52.558,32.233 54.839,32.233 55.372,32.766 55.372,33.401 55.372,33.718 ; U1.13@52.558,36.782 55.26,36.782 55.372,36.893 ; 55.372,34.036 55.372,33.718 ; 55.372,38.163 55.372,36.893 ; 55.372,33.718 55.372,36.893
  Front w1.016: 55.372,32.766 55.372,38.163 v1(55.689,38.481) ; C10.1@64.897,39.116 67.437,36.576 L3.2@75.057,36.576
  Back w0.368: 73.787,37.846 L3.2@75.057,36.576
  Back w1.016: v1(55.689,38.481) 64.262,38.481 C10.1@64.897,39.116 ; C16.1@73.787,41.656 73.787,37.846 L3.2@75.057,36.576
B: FB3.1 R13.1 U1.2 | length 51
  Front w0.368: 49.299,29.632 50.292,29.632 U1.2@52.558,29.632
  Front w0.505: 45.212,41.974 v1(45.212,48.323)
  Front w0.508: 45.212,41.974 46.799,40.386 46.799,33.084 46.799,32.131 49.299,29.632
  Back w0.508: v1(45.212,48.323) 68.389,48.323 FB3.1@68.707,48.006 69.977,49.276 R13.1@69.977,51.181
BLUE: C25.1 FB3.2 P1.3 | length 12.9
  Front w0.762: FB3.2@78.867,48.006 C25.1@81.407,48.006 83.393,49.992 P1.3@90.932,49.992
C\A\S\: C22.1 R16.2 U3.17 U4.17 U5.17 U6.17 | length 73.6
  Front w0.368: U4.17@14.097,74.676 U4.17@14.097,75.311 ; U3.17@44.577,74.676 44.577,75.311 43.307,76.581 43.307,80.391 44.577,81.661 U5.17@44.577,84.836
  Front w0.505: R16.2@14.097,63.246 14.097,64.516 12.827,65.786 12.827,70.231 14.097,71.501 U4.17@14.097,74.676 ; U4.17@14.097,75.311 12.827,76.581 12.827,80.391 14.097,81.661 U6.17@14.097,84.836
  Back w0.505: C22.1@9.017,61.976 12.827,61.976 R16.2@14.097,63.246 ; U4.17@14.097,74.676 16.637,72.136 17.272,71.501 41.402,71.501 42.037,72.136 U3.17@44.577,74.676
D0: BUS1.40 U1.25 | length 45.5
  Front w0.368: U1.25@52.558,44.582 55.621,44.582 57.912,42.291 57.912,21.971 59.182,20.701 59.182,10.541 58.547,9.906 BUS1.40@58.547,3.873
D1: BUS1.39 U1.26 | length 46.9
  Front w0.368: U1.26@52.558,45.232 54.737,45.232 55.923,45.232 58.547,42.608 58.547,22.288 59.817,21.018 59.817,10.541 61.087,9.271 BUS1.39@61.087,3.873
D2: BUS1.38 U1.27 | length 53.2
  Front w0.368: U1.27@52.558,45.883 55.054,45.883 56.225,45.883 59.182,42.926 59.182,22.581 60.452,21.311 60.452,12.446 63.627,9.271 ; BUS1.38@63.627,3.873 63.627,9.271 ; 60.452,12.441 60.447,12.441 60.452,12.441 ; 60.452,12.441 63.622,9.271 63.627,9.271
D3: BUS1.37 U1.28 | length 50.6
  Front w0.368: U1.28@52.558,46.533 55.054,46.533 56.528,46.533 59.817,43.243 59.817,22.924 61.087,21.653 61.087,14.351 ; BUS1.37@66.167,3.873 66.167,8.636 66.167,9.271 61.082,14.356 ; 61.082,14.356 61.087,14.351 ; 61.082,14.356 61.087,14.351
D4: BUS1.36 U1.29 | length 52.9
  Front w0.368: U1.29@52.558,47.18 54.737,47.18 56.832,47.18 60.452,43.561 60.452,23.241 61.722,21.971 61.722,14.986 67.437,9.271 68.072,9.271 68.707,8.636 BUS1.36@68.707,3.873
D5: BUS1.35 U1.30 | length 55.9
  Front w0.368: U1.30@52.558,47.831 55.372,47.831 57.14,47.831 61.09,43.881 61.09,23.558 62.357,22.291 62.357,15.621 68.072,9.906 70.617,9.906 71.247,9.276 BUS1.35@71.247,3.873
D6: BUS1.34 U1.31 | length 58.5
  Front w0.368: U1.31@52.558,48.481 56.007,48.481 57.437,48.481 61.722,44.196 61.722,23.876 62.992,22.606 62.992,16.256 ; BUS1.34@73.787,3.873 73.787,9.271 72.517,10.541 68.707,10.541 62.987,16.261 ; 62.987,16.261 62.992,16.256 ; 62.987,16.261 62.992,16.256
D7: BUS1.33 U1.32 | length 66.6
  Front w0.368: U1.32@52.558,49.131 56.642,49.131 57.803,49.131 62.389,44.545 62.389,24.162 63.627,22.924 63.627,16.764 67.945,12.446 68.072,12.446 73.152,12.446 76.327,9.271 ; 76.327,9.271 BUS1.33@76.327,3.873 76.327,9.271
G: FB2.1 R12.1 U1.3 | length 51.9
  Front w0.368: 49.657,30.543 49.919,30.282 U1.3@52.558,30.282
  Front w0.505: 46.164,42.608 v1(46.164,49.911)
  Front w0.508: 46.164,42.608 47.752,41.021 47.752,32.766 47.752,32.448 49.657,30.543
  Back w0.508: v1(46.164,49.911) 64.262,49.911 FB2.1@68.707,54.356 69.977,55.626 R12.1@69.977,57.531